# Altium PCB PCB4_layout.PcbDoc
Units mm, origin at the board's own origin, x right, y up, seen from the top; angles counter-clockwise.
Board outline 80 x 80 mm, 2 copper layers (Top Layer, Bottom Layer), stack 1.671 mm thick; 9 components, 2 nets, 53 pads, 672 vias.
Unrouted connection lines stored in the file: 7.
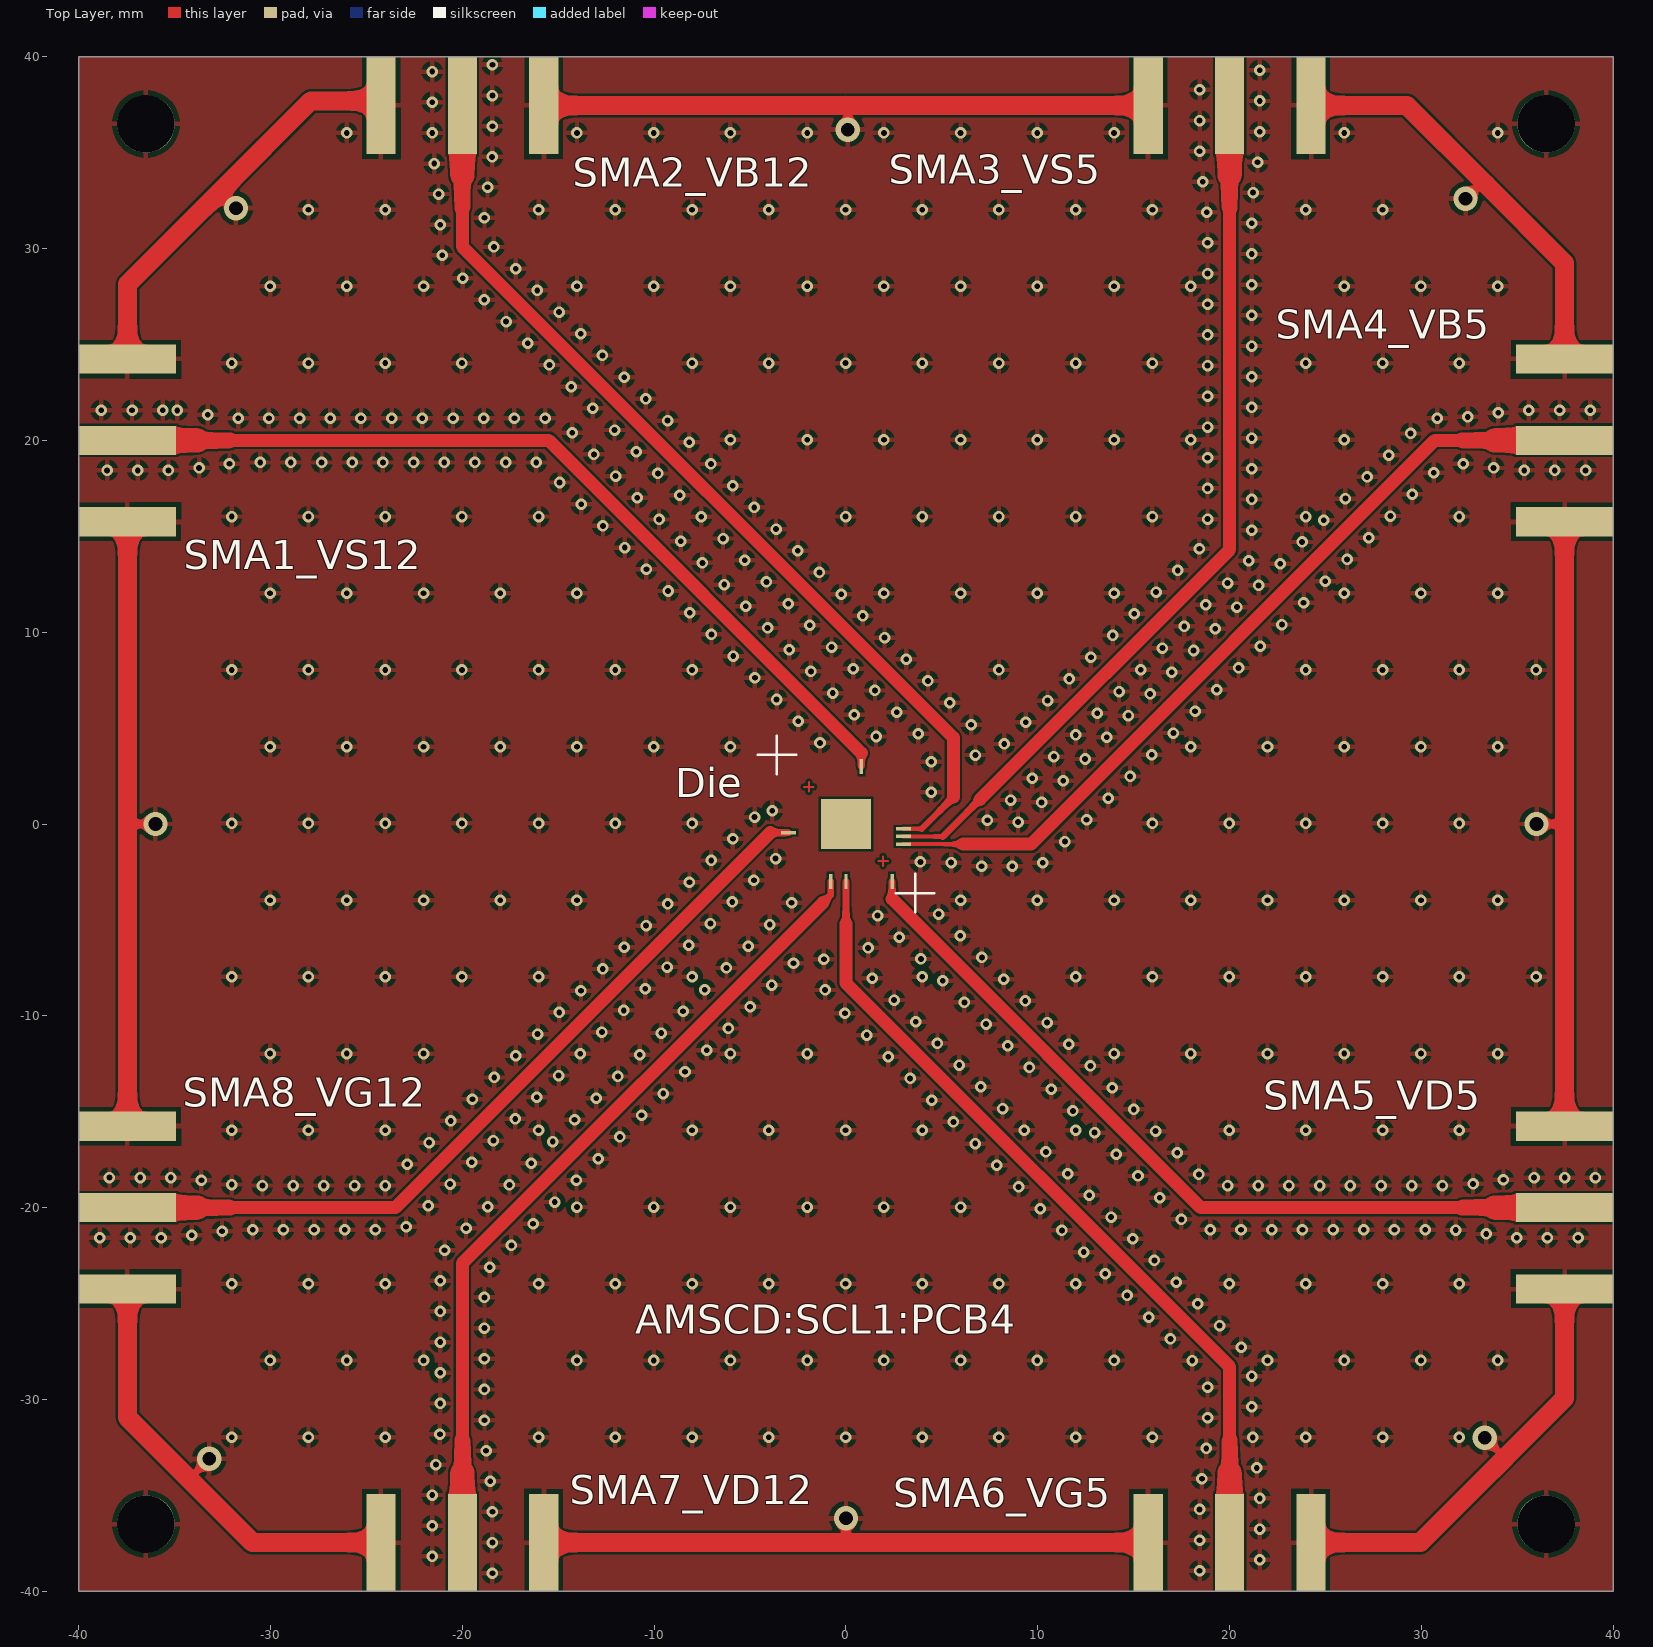
[diagram p0: Top Layer view]
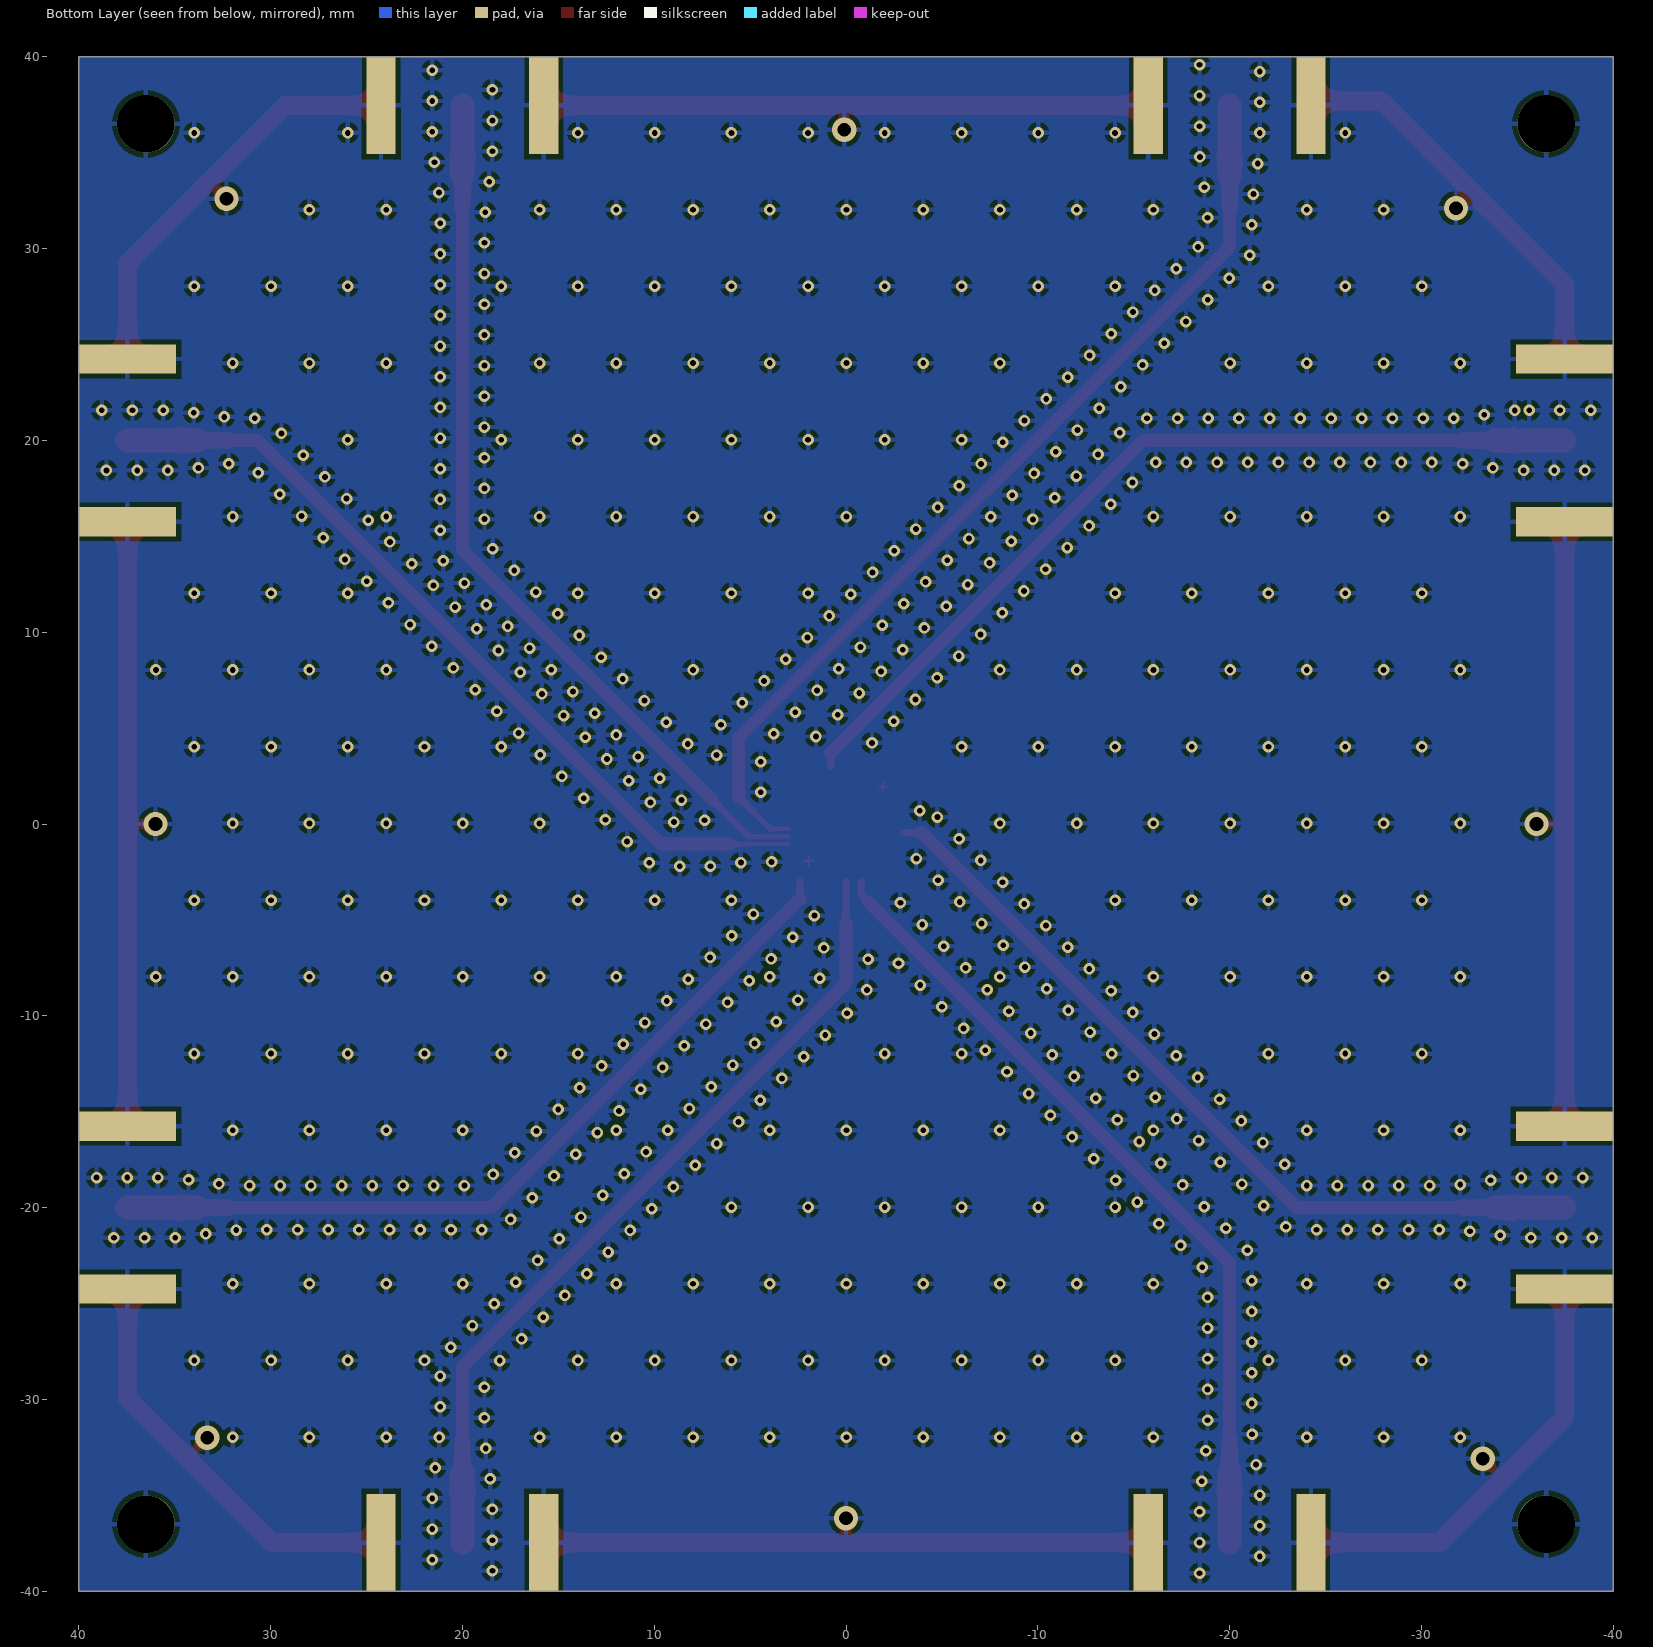
[diagram p1: Bottom Layer view, seen from below]
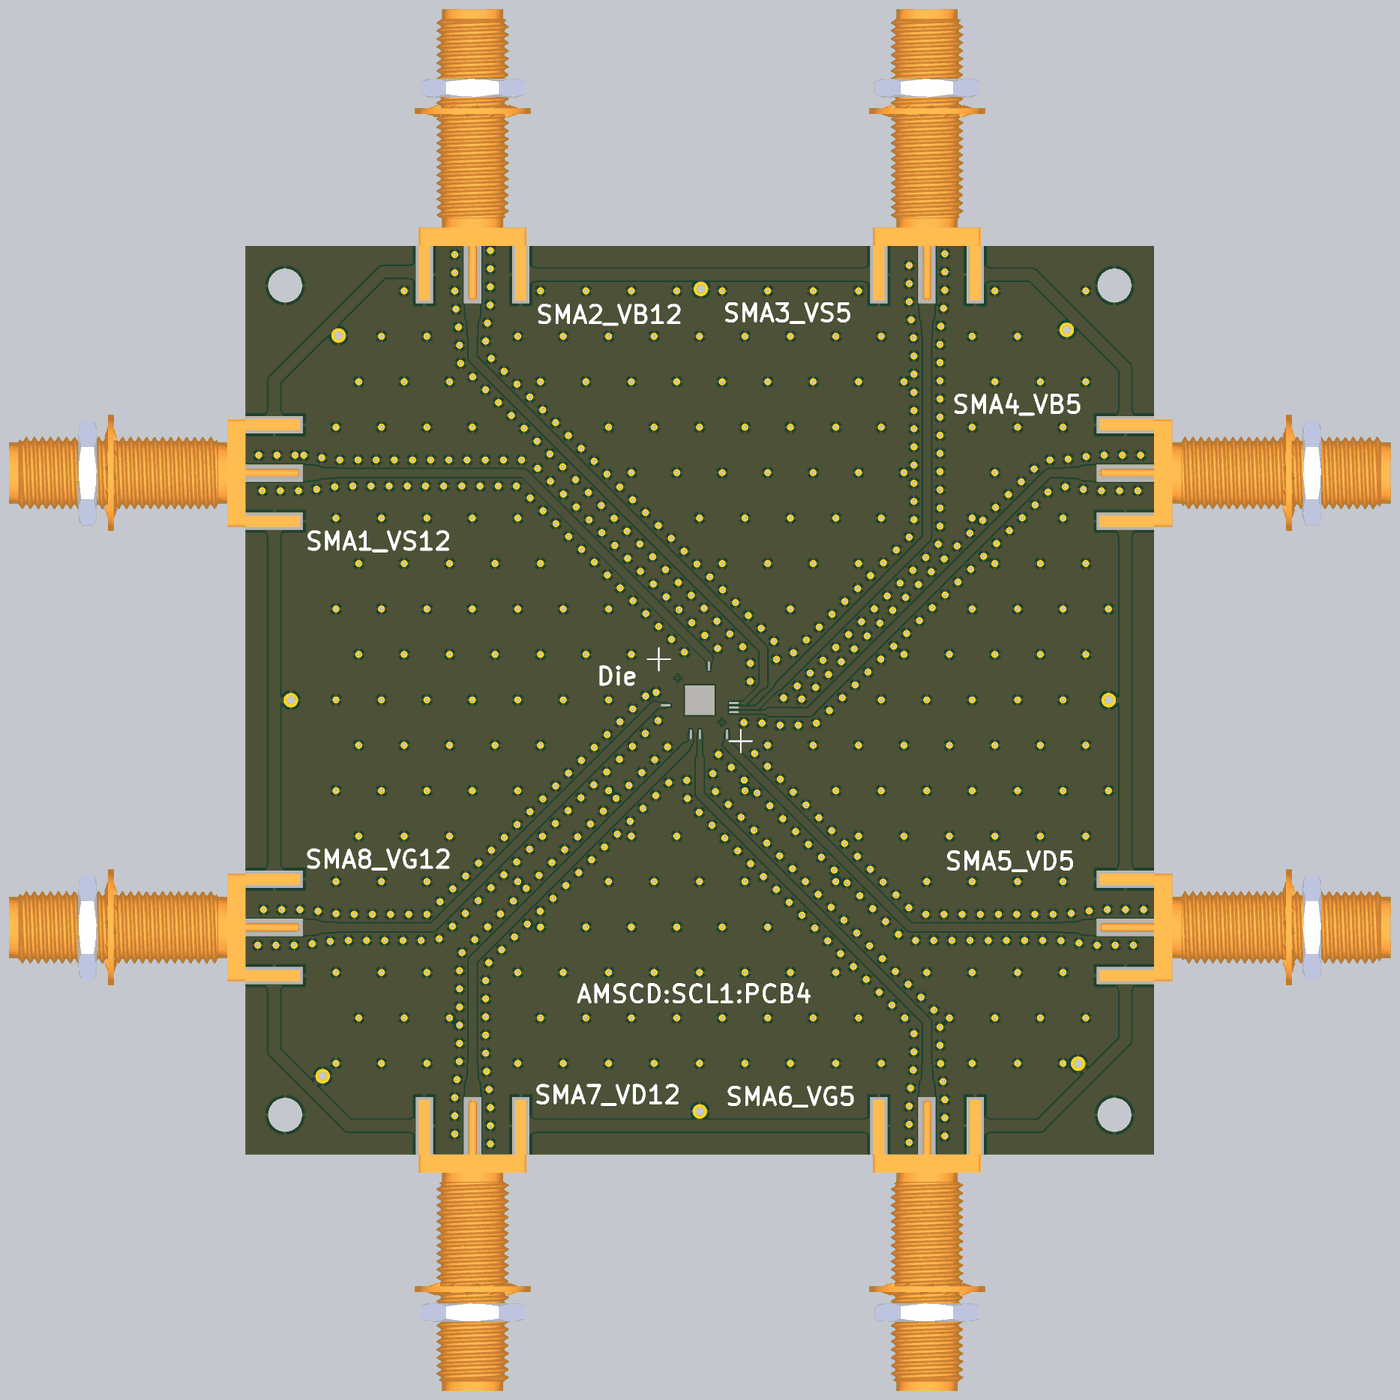
[diagram p2: 3D render of the assembled board from above, using the file's embedded part models]

## Layer stack, top to bottom
Top Solder: solder mask 0.0102, Solder Resist, Dk 3.5
Top Layer: signal copper 0.0356
Dielectric 1: dielectric 1.6, FR-4, Dk 4.5
Bottom Layer: signal copper 0.0356
Bottom Solder: solder mask 0.0102, Solder Resist, Dk 3.5

## Board outline
-40,-40 -40,40 40,40 40,-40

## Design rules (kind name [scope] priority, off if disabled: settings)
Clearance [All] p1: gap=0.127 ignorepadtopadclearanceinfootprint=FALSE
HoleSize [All] p1: absolutevalues=TRUE maxlimit=3 minlimit=0.025 maxpercent=80.000 minpercent=20.000
MinimumSolderMaskSliver [All] p1: minsoldermaskwidth=0.05
PolygonConnect [All] p1: connectstyle=Relief reliefconductorwidth=0.254 reliefentries=4 polygonreliefangle="90 Angle" airgapwidth=0.254
RoutingVias [All] p1: holewidth=0.711 width=1.27 viastyle="Through Hole" minholewidth=0.711 minwidth=1.27 maxholewidth=0.711 maxwidth=1.27
SilkToSilkClearance [All] p1: silktosilkclearance=0.1
SilkToSolderMaskClearance [IsPad] p1: minsilkscreentomaskgap=0.1 clearancetoexposedcopper=TRUE
SolderMaskExpansion [All] p1: expansion=0 istentingtop=FALSE
UnRoutedNet [All] p1 off:
Width [All] p1: maxlimit=1.5 minlimit=0.1 preferedwidth=0.675 impedanceprofiledriven=TRUE impedanceprofileid={A38DEDC3-0A10-445F-B79F-480C3B5B4F20} impedanceprofilevalue=50.000000 minimp=50.000000 maximp=50.000000 favimp=50.000000
25 further rules are at their usual default settings.

## Components (designator, comment, footprint, x,y, rotation, side; value= is the part's Value field where it differs from the comment)
Die "Comment" COB4_7x7 0,0 r0 top
SMA1_VS12 "Comment" TE_CONSMA003.062-L-G#1 -40,20 r270 top
SMA2_VB12 "Comment" TE_CONSMA003.062-L-G#2 -20,40 r180 top
SMA3_VS5 "Comment" TE_CONSMA003.062-L-G#3 20,40 r180 top
SMA4_VB5 "Comment" TE_CONSMA003.062-L-G#4 40,20 r90 top
SMA5_VD5 "Comment" TE_CONSMA003.062-L-G#5 40,-20 r90 top
SMA6_VG5 "Comment" TE_CONSMA003.062-L-G#6 20,-40 r0 top
SMA7_VD12 "Comment" TE_CONSMA003.062-L-G#7 -20,-40 r0 top
SMA8_VG12 "Comment" TE_CONSMA003.062-L-G#8 -40,-20 r270 top

## Footprints (in the part's own frame and the unit in brackets; to place one, negate y for a bottom-side part, rotate by r counter-clockwise, add the part's x,y. Pads: shape width x height; smd on the part's side, far side on the other; paste and mask are expansions set on the pad)
COB4_7x7 [mm]
  rect 2.6x2.6 smd: 9(0,0)
  rect 0.18x0.8 smd: SMA1_VS12(0.8,3) SMA5_VD5(2.4,-3) SMA6_VG5(0,-3) SMA7_VD12(-0.8,-3)
  rect 0.8x0.18 smd: SMA2_VB12(3,-0.25) SMA3_VS5(3,-0.65) SMA4_VB5(3,-1.05) SMA8_VG12(-3,-0.45)
  silkscreen extent -4.6,-4.6 4.6,4.6
TE_CONSMA003.062-L-G#1 [mm]
  rect 1.52x5.08 smd: 2(-4.24,2.54) 3(4.24,2.54) SMA1_VS12(0,2.54)
  rect 1.52x5.08 smd far side: 4(-4.24,2.54) 5(4.24,2.54)
  body extent -5.1,-20.8 5.1,4.8, height 5.5
TE_CONSMA003.062-L-G#2 [mm]
  rect 1.52x5.08 smd: 2(-4.24,2.54) 3(4.24,2.54) SMA2_VB12(0,2.54)
  rect 1.52x5.08 smd far side: 4(-4.24,2.54) 5(4.24,2.54)
  body extent -5.1,-20.8 5.1,4.8, height 5.5
TE_CONSMA003.062-L-G#3 [mm]
  rect 1.52x5.08 smd: 2(-4.24,2.54) 3(4.24,2.54) SMA3_VS5(0,2.54)
  rect 1.52x5.08 smd far side: 4(-4.24,2.54) 5(4.24,2.54)
  body extent -5.1,-20.8 5.1,4.8, height 5.5
TE_CONSMA003.062-L-G#4 [mm]
  rect 1.52x5.08 smd: 2(-4.24,2.54) 3(4.24,2.54) SMA4_VB5(0,2.54)
  rect 1.52x5.08 smd far side: 4(-4.24,2.54) 5(4.24,2.54)
  body extent -5.1,-20.8 5.1,4.8, height 5.5
TE_CONSMA003.062-L-G#5 [mm]
  rect 1.52x5.08 smd: 2(-4.24,2.54) 3(4.24,2.54) SMA5_VD5(0,2.54)
  rect 1.52x5.08 smd far side: 4(-4.24,2.54) 5(4.24,2.54)
  body extent -5.1,-20.8 5.1,4.8, height 5.5
TE_CONSMA003.062-L-G#6 [mm]
  rect 1.52x5.08 smd: 2(-4.24,2.54) 3(4.24,2.54) SMA6_VG5(0,2.54)
  rect 1.52x5.08 smd far side: 4(-4.24,2.54) 5(4.24,2.54)
  body extent -5.1,-20.8 5.1,4.8, height 5.5
TE_CONSMA003.062-L-G#7 [mm]
  rect 1.52x5.08 smd: 2(-4.24,2.54) 3(4.24,2.54) SMA7_VD12(0,2.54)
  rect 1.52x5.08 smd far side: 4(-4.24,2.54) 5(4.24,2.54)
  body extent -5.1,-20.8 5.1,4.8, height 5.5
TE_CONSMA003.062-L-G#8 [mm]
  rect 1.52x5.08 smd: 2(-4.24,2.54) 3(4.24,2.54) SMA8_VG12(0,2.54)
  rect 1.52x5.08 smd far side: 4(-4.24,2.54) 5(4.24,2.54)
  body extent -5.1,-20.8 5.1,4.8, height 5.5

## Free pads (board coordinates)
  round 3 hole 3 unplated: 2(-36.5,-36.5) 2(-36.5,36.5) 2(36.5,-36.5) 2(36.5,36.5)

## Via types
v1: diameter 0.6, hole 0.3, Top Layer to Bottom Layer, 664 vias
v2: diameter 1.27, hole 0.711, Top Layer to Bottom Layer, 8 vias

## Nets (pads, with @x,y where several pads share a name; then routed paths per layer and width w, separated by ;. In a path a pad name is that pad's centre, name@x,y a point inside that pad or via, vN(x,y) a via of type N, cw(c..) or ccw(c..) an arc to the next point about the centre after c; other vN are vias at no path point)
GND: pad.2 SMA1_VS12.2 SMA1_VS12.3 SMA1_VS12.4 SMA1_VS12.5 SMA2_VB12.2 SMA2_VB12.3 SMA2_VB12.4 SMA2_VB12.5 SMA3_VS5.2 SMA3_VS5.3 SMA3_VS5.4 SMA3_VS5.5 SMA4_VB5.2 SMA4_VB5.3 SMA4_VB5.4 SMA4_VB5.5 SMA5_VD5.2 SMA5_VD5.3 SMA5_VD5.4 SMA5_VD5.5 SMA6_VG5.2 SMA6_VG5.3 SMA6_VG5.4 SMA6_VG5.5 SMA7_VD12.2 SMA7_VD12.3 SMA7_VD12.4 SMA7_VD12.5 SMA8_VG12.2 SMA8_VG12.3 SMA8_VG12.4 SMA8_VG12.5 | length 224.6
  Top Layer w0.35: -37.46,0 v2(-36,0) ; -34.2,-34.2 -34.2,-34.1 v2(-33.2,-33.1) ; -32.68,32.92 -31.86,32.1 v2(-31.8,32.1) ; SMA2_VB12.3@-24.48,37.7 SMA2_VB12.3 ; 0,-37.46 v2(0,-36.2) ; 0,37.46 0.1,37.36 v2(0.1,36.2) ; v2(32.3,32.6) 33.05,33.35 33.35,33.35 ; v2(33.3,-32) 34.3,-33 34.4,-33 ; v2(36,0) 37.46,0
  Top Layer w1: SMA8_VG12.3 -37.46,-30.94 -34.2,-34.2 -30.94,-37.46 SMA7_VD12.2 ; SMA8_VG12.2 -37.46,0 SMA1_VS12.3 ; SMA1_VS12.2 -37.46,28.14 -32.68,32.92 -27.9,37.7 SMA2_VB12.3@-24.48,37.7 ; SMA7_VD12.3 0,-37.46 SMA6_VG5.2 ; SMA2_VB12.2 0,37.46 SMA3_VS5.3 ; SMA6_VG5.3 29.94,-37.46 34.4,-33 37.46,-29.94 SMA5_VD5.2 ; SMA3_VS5.2 29.24,37.46 33.35,33.35 37.46,29.24 SMA4_VB5.3 ; SMA5_VD5.3 37.46,0 SMA4_VB5.2
  other v1: -18.433,-39.06 18.433,-38.937 21.567,-38.361 -21.567,-38.185 -18.433,-37.46 18.433,-37.337 21.567,-36.761 -21.567,-36.585 -18.433,-35.86 18.433,-35.737 21.567,-35.161 -21.567,-34.985 -18.549,-34.264 18.556,-34.142 21.414,-33.569 -21.379,-33.396 -18.764,-32.678 18.785,-32.558 -32.025,-31.97 -28.025,-31.97 -24.025,-31.97 -16.025,-31.97 -12.025,-31.97 -8.025,-31.97 -4.025,-31.97 -0.025,-31.97 3.975,-31.97 7.975,-31.97 11.975,-31.97 15.975,-31.97 21.202,-31.983 23.975,-31.97 27.975,-31.97 31.975,-31.97 -21.173,-31.81 -18.849,-31.081 18.849,-30.959 21.151,-30.383 -21.151,-30.21 -18.849,-29.481 18.849,-29.359 21.151,-28.783 -21.151,-28.61 18.047,-27.975 -30.025,-27.97 -26.025,-27.97 -22.025,-27.97 -14.025,-27.97 -10.025,-27.97 -6.025,-27.97 -2.025,-27.97 1.975,-27.97 5.975,-27.97 9.975,-27.97 13.975,-27.97 21.975,-27.97 25.975,-27.97 29.975,-27.97 33.975,-27.97 -18.849,-27.881 20.607,-27.279 -21.151,-27.01 16.916,-26.843 -18.849,-26.281 19.475,-26.148 15.784,-25.712 -21.151,-25.41 18.344,-25.016 -18.849,-24.681 14.653,-24.581 -32.025,-23.97 -28.025,-23.97 -24.025,-23.97 -16.025,-23.97 -12.025,-23.97 -8.025,-23.97 -4.025,-23.97 -0.025,-23.97 3.975,-23.97 7.975,-23.97 11.975,-23.97 19.975,-23.97 23.975,-23.97 27.975,-23.97 31.975,-23.97 17.213,-23.885 -21.151,-23.81 13.522,-23.449 -18.576,-23.104 16.081,-22.753 12.39,-22.318 -20.926,-22.226 -17.445,-21.973 14.95,-21.622 -38.91,-21.567 -37.31,-21.567 -35.71,-21.567 34.968,-21.567 36.568,-21.567 38.168,-21.567 -34.115,-21.444 33.38,-21.374 -32.529,-21.229 11.259,-21.187 31.793,-21.17 -30.931,-21.151 -29.331,-21.151 -27.731,-21.151 -26.131,-21.151 -24.531,-21.151 18.993,-21.151 20.593,-21.151 22.193,-21.151 23.793,-21.151 25.393,-21.151 26.993,-21.151 28.593,-21.151 30.193,-21.151 -19.809,-21.081 -22.939,-20.998 -16.313,-20.841 17.486,-20.614 13.818,-20.491 10.127,-20.055 -18.677,-19.949 -14.025,-19.97 -10.025,-19.97 -6.025,-19.97 -2.025,-19.97 1.975,-19.97 5.975,-19.97 -21.774,-19.901 -15.182,-19.71 16.355,-19.483 12.687,-19.359 8.996,-18.924 -30.422,-18.849 -28.822,-18.849 -27.222,-18.849 -25.622,-18.849 -24.022,-18.849 19.893,-18.849 21.493,-18.849 23.093,-18.849 24.693,-18.849 26.293,-18.849 27.893,-18.849 29.493,-18.849 31.093,-18.849 -17.546,-18.818 -32.021,-18.796 -20.642,-18.77 32.691,-18.763 -33.607,-18.579 -14.051,-18.579 34.277,-18.549 -38.4,-18.433 -36.8,-18.433 -35.2,-18.433 35.872,-18.433 37.472,-18.433 39.072,-18.433 15.223,-18.351 18.401,-18.273 11.556,-18.228 7.865,-17.792 -22.868,-17.741 -16.414,-17.687 -19.511,-17.639 -12.919,-17.447 14.092,-17.22 17.269,-17.142 10.424,-17.097 6.733,-16.661 -21.737,-16.609 -15.283,-16.555 -18.379,-16.507 -11.788,-16.316 12.961,-16.088 16.138,-16.01 -32.025,-15.97 -28.025,-15.97 -24.025,-15.97 -16.025,-15.97 -8.025,-15.97 -4.025,-15.97 -0.025,-15.97 3.975,-15.97 9.293,-15.965 11.975,-15.97 19.975,-15.97 23.975,-15.97 27.975,-15.97 31.975,-15.97 5.602,-15.53 -20.606,-15.478 -14.152,-15.424 -17.248,-15.376 -10.657,-15.184 11.829,-14.957 15.007,-14.879 8.162,-14.834 4.471,-14.398 -19.474,-14.347 -13.02,-14.293 -16.117,-14.244 -9.525,-14.053 10.698,-13.826 13.875,-13.747 7.03,-13.702 3.339,-13.267 -18.343,-13.215 -11.889,-13.161 -14.985,-13.113 -8.394,-12.922 9.567,-12.694 12.744,-12.616 5.899,-12.571 2.208,-12.136 -17.212,-12.084 -10.758,-12.03 -13.854,-11.982 -30.025,-11.97 -26.025,-11.97 -22.025,-11.97 -6.025,-11.97 -2.025,-11.97 13.975,-11.97 17.975,-11.97 21.975,-11.97 25.975,-11.97 29.975,-11.97 33.975,-11.97 -7.263,-11.79 8.435,-11.563 11.612,-11.485 4.768,-11.44 1.076,-11.004 -16.08,-10.952 -9.626,-10.898 -12.723,-10.85 -6.131,-10.659 7.304,-10.432 10.481,-10.353 3.636,-10.308 -0.055,-9.873 -14.949,-9.821 -8.495,-9.767 -11.591,-9.719 -5,-9.528 6.172,-9.3 9.35,-9.222 2.505,-9.177 -13.817,-8.69 -1.09,-8.653 -7.363,-8.636 -10.46,-8.588 -3.868,-8.396 5.041,-8.169 8.218,-8.091 1.373,-8.046 -32.025,-7.97 -28.025,-7.97 -24.025,-7.97 -20.025,-7.97 -16.025,-7.97 -8.025,-7.97 3.975,-7.97 11.975,-7.97 15.975,-7.97 19.975,-7.97 23.975,-7.97 27.975,-7.97 31.975,-7.97 35.975,-7.97 -12.686,-7.558 -6.232,-7.504 -9.328,-7.456 -2.737,-7.265 -1.151,-7.054 3.91,-7.037 7.087,-6.959 1.151,-6.461 -11.555,-6.427 -5.101,-6.373 -8.197,-6.325 2.778,-5.906 5.956,-5.828 -10.423,-5.296 -3.969,-5.242 -7.066,-5.193 1.647,-4.775 4.824,-4.696 -9.292,-4.164 -2.838,-4.11 -5.934,-4.062 -30.025,-3.97 -26.025,-3.97 -22.025,-3.97 -18.025,-3.97 -14.025,-3.97 5.975,-3.97 9.975,-3.97 13.975,-3.97 17.975,-3.97 21.975,-3.97 25.975,-3.97 29.975,-3.97 33.975,-3.97 -8.161,-3.033 -4.803,-2.931 7.067,-2.201 8.667,-2.201 10.257,-2.021 5.479,-2.011 3.879,-1.976 -7.029,-1.901 -3.672,-1.799 11.413,-0.915 -5.898,-0.77 -32.025,0.03 -28.025,0.03 -24.025,0.03 -20.025,0.03 -16.025,0.03 -12.025,0.03 -8.025,0.03 15.975,0.03 19.975,0.03 23.975,0.03 27.975,0.03 31.975,0.03 8.969,0.101 7.372,0.199 12.545,0.217 -4.766,0.361 -3.845,0.689 10.198,1.126 8.578,1.25 13.676,1.348 4.442,1.65 11.329,2.257 9.71,2.382 14.807,2.479 4.449,3.25 12.461,3.389 10.841,3.513 6.751,3.597 15.939,3.611 -30.025,4.03 -26.025,4.03 -22.025,4.03 -18.025,4.03 -14.025,4.03 -10.025,4.03 -6.025,4.03 17.975,4.03 21.975,4.03 25.975,4.03 29.975,4.03 33.975,4.03 8.244,4.172 -1.356,4.228 13.592,4.52 1.566,4.562 11.972,4.645 3.772,4.7 17.07,4.742 6.522,5.18 9.375,5.303 -2.487,5.359 14.724,5.651 0.435,5.693 13.104,5.776 2.641,5.831 18.201,5.874 5.404,6.324 10.507,6.435 -3.618,6.491 15.855,6.783 -0.697,6.825 14.235,6.907 1.51,6.963 19.333,7.005 4.272,7.456 11.638,7.566 -4.75,7.622 16.986,7.914 -1.828,7.956 -32.025,8.03 -28.025,8.03 -24.025,8.03 -20.025,8.03 -16.025,8.03 -12.025,8.03 -8.025,8.03 7.975,8.03 15.366,8.039 23.975,8.03 27.975,8.03 31.975,8.03 35.975,8.03 0.378,8.094 20.464,8.136 3.141,8.587 12.769,8.697 -5.881,8.753 18.118,9.045 -2.96,9.087 16.498,9.17 -0.753,9.225 21.595,9.268 2.009,9.718 13.901,9.829 -7.012,9.885 19.249,10.177 -4.091,10.219 17.629,10.301 -1.884,10.357 22.727,10.399 0.878,10.85 15.032,10.96 -8.144,11.016 20.38,11.308 -5.222,11.35 18.761,11.433 -3.016,11.488 23.858,11.53 -0.253,11.981 -30.025,12.03 -26.025,12.03 -22.025,12.03 -18.025,12.03 -14.025,12.03 1.975,12.03 5.975,12.03 9.975,12.03 13.975,12.03 25.975,12.03 29.975,12.03 33.975,12.03 16.164,12.091 -9.275,12.147 21.512,12.44 -6.354,12.481 19.892,12.564 -4.147,12.619 24.99,12.662 -1.385,13.112 17.295,13.223 -10.407,13.279 22.643,13.571 -7.485,13.613 20.992,13.726 -5.279,13.751 26.121,13.793 -2.516,14.244 18.426,14.354 -11.538,14.41 23.775,14.702 -8.616,14.744 -6.41,14.882 27.252,14.925 21.151,15.318 -3.647,15.375 -12.669,15.542 24.906,15.834 -9.748,15.876 18.849,15.897 -7.541,16.014 -32.025,16.03 -28.025,16.03 -24.025,16.03 -20.025,16.03 -16.025,16.03 -0.025,16.03 3.975,16.03 7.975,16.03 11.975,16.03 15.975,16.03 23.975,16.03 31.975,16.03 28.384,16.056 -4.779,16.507 -13.801,16.673 21.151,16.918 26.037,16.965 -10.879,17.007 -8.673,17.145 29.515,17.187 18.849,17.497 -5.91,17.638 -14.932,17.804 27.169,18.096 -12.011,18.138 -9.804,18.276 30.646,18.319 -38.522,18.433 -36.922,18.433 -35.322,18.433 35.356,18.433 36.956,18.433 38.556,18.433 21.151,18.518 -33.727,18.565 33.761,18.561 -32.143,18.785 -7.042,18.769 32.177,18.785 -30.544,18.849 -28.944,18.849 -27.344,18.849 -25.744,18.849 -24.144,18.849 -22.544,18.849 -20.944,18.849 -19.344,18.849 -17.744,18.849 -16.144,18.849 18.849,19.097 28.3,19.228 -13.142,19.27 -10.935,19.408 -8.173,19.901 -6.025,20.03 -2.025,20.03 1.975,20.03 5.975,20.03 9.975,20.03 13.975,20.03 17.975,20.03 25.975,20.03 21.151,20.118 29.431,20.359 -14.273,20.401 -12.067,20.539 18.849,20.697 -9.304,21.032 -31.687,21.151 -30.087,21.151 -28.487,21.151 -26.887,21.151 -25.287,21.151 -23.687,21.151 -22.087,21.151 -20.487,21.151 -18.887,21.151 -17.287,21.151 -15.687,21.151 30.822,21.151 32.42,21.223 -33.275,21.342 34.005,21.444 -38.823,21.567 -37.223,21.567 -35.623,21.567 -34.86,21.559 35.6,21.567 37.2,21.567 38.8,21.567 -13.198,21.67 21.151,21.718 -10.436,22.163 18.849,22.297 -14.33,22.802 -11.567,23.295 21.151,23.318 18.849,23.897 -15.461,23.933 -32.025,24.03 -28.025,24.03 -24.025,24.03 -20.025,24.03 -8.025,24.03 -4.025,24.03 -0.025,24.03 3.975,24.03 7.975,24.03 11.975,24.03 15.975,24.03 23.975,24.03 27.975,24.03 31.975,24.03 -12.698,24.426 21.151,24.918 -16.592,25.064 18.849,25.497 -13.83,25.558 -17.724,26.196 21.151,26.518 -14.961,26.689 18.849,27.097 -18.855,27.327 -16.092,27.82 -30.025,28.03 -26.025,28.03 -22.025,28.03 -14.025,28.03 -10.025,28.03 -6.025,28.03 -2.025,28.03 1.975,28.03 5.975,28.03 9.975,28.03 13.975,28.03 17.975,28.03 25.975,28.03 29.975,28.03 33.975,28.03 21.151,28.118 -19.986,28.459 18.849,28.697 -17.224,28.952 -21.055,29.65 21.151,29.718 -18.355,30.083 18.849,30.297 -21.151,31.247 21.151,31.318 -18.849,31.605 18.81,31.897 -28.025,32.03 -24.025,32.03 -16.025,32.03 -12.025,32.03 -8.025,32.03 -4.025,32.03 -0.025,32.03 3.975,32.03 7.975,32.03 11.975,32.03 15.975,32.03 23.975,32.03 27.975,32.03 -21.244,32.844 21.221,32.917 -18.689,33.197 18.603,33.483 -21.461,34.429 21.456,34.499 -18.452,34.779 18.433,35.074 -26.025,36.03 -21.567,36.026 -14.025,36.03 -10.025,36.03 -6.025,36.03 -2.025,36.03 1.975,36.03 5.975,36.03 9.975,36.03 13.975,36.03 25.975,36.03 33.975,36.03 21.567,36.095 -18.433,36.379 18.433,36.674 -21.567,37.626 21.567,37.695 -18.433,37.979 18.433,38.274 -21.567,39.226 21.567,39.295 -18.433,39.579
SIG: Die.SMA1_VS12 Die.SMA2_VB12 Die.SMA3_VS5 Die.SMA4_VB5 Die.SMA5_VD5 Die.SMA6_VG5 Die.SMA7_VD12 Die.SMA8_VG12 SMA1_VS12.SMA1_VS12 SMA2_VB12.SMA2_VB12 SMA3_VS5.SMA3_VS5 SMA4_VB5.SMA4_VB5 SMA5_VD5.SMA5_VD5 SMA6_VG5.SMA6_VG5 SMA7_VD12.SMA7_VD12 SMA8_VG12.SMA8_VG12 | length 355.5
  Top Layer w0.22: Die.SMA4_VB5 6.1,-1.05 ; Die.SMA3_VS5 5.05,-0.65 ; Die.SMA2_VB12 3.95,-0.25
  Top Layer w0.35: -3.95,-0.45 Die.SMA8_VG12 ; -1.2,-4.1 -0.8,-3.7 Die.SMA7_VD12 ; 0,-5.2 Die.SMA6_VG5 ; Die.SMA1_VS12 0.8,3.7 ; 2.4,-3.9 Die.SMA5_VD5 ; 3.95,-0.25 5.6,1.4 ; 5.05,-0.65 6.98,1.28
  Top Layer w0.675: -32.1,-20 -23.5,-20 -3.95,-0.45 ; -32.1,20 -15.5,20 0.8,3.7 ; -20,-32.1 -20,-22.9 -1.2,-4.1 ; -20,32.1 -20,30.1 5.6,4.5 5.6,1.4 ; 0,-5.2 0,-8.3 20,-28.3 20,-32.1 ; 2.4,-3.9 18.5,-20 32.1,-20 ; 6.1,-1.05 9.65,-1.05 30.7,20 32.1,20 ; 6.98,1.28 20,14.3 20,32.1
  Top Layer w0.8: -33.8,-20 -32.1,-20 ; -33.8,20 -32.1,20 ; -20,-33.8 -20,-32.1 ; -20,32.1 -20,33.8 ; 20,-33.8 20,-32.1 ; 20,32.1 20,33.8 ; 32.1,-20 33.8,-20 ; 32.1,20 33.8,20
  Top Layer w1.25: SMA8_VG12.SMA8_VG12 -33.8,-20 ; SMA1_VS12.SMA1_VS12 -33.8,20 ; SMA7_VD12.SMA7_VD12 -20,-33.8 ; -20,33.8 SMA2_VB12.SMA2_VB12 ; SMA6_VG5.SMA6_VG5 20,-33.8 ; 20,33.8 SMA3_VS5.SMA3_VS5 ; 33.8,-20 SMA5_VD5.SMA5_VD5 ; 33.8,20 SMA4_VB5.SMA4_VB5
pads on no net: Die.9
copper on no net: | length 2
  Top Layer w0.1: -2.183,1.933 -1.683,1.933 ; -1.933,1.683 -1.933,2.183 ; 1.683,-1.933 2.183,-1.933 ; 1.933,-2.183 1.933,-1.683

## Polygon pours and split planes (outlines as drawn)
GND on Bottom Layer "GND_L02_P000" (solid, pour order 0): -40,40 40,40 40,-40 -40,-40
GND on Top Layer "GND_L01_P002" (solid, pour order 2): -40,40 40,40 40,-40 -40,-40

## Silkscreen, mask and mechanical layers (free items; w line width, h text height)
Top Overlay:
  text "AMSCD:SCL1:PCB4" at -10.991,-26.581 h1.52